# Altium PCB PC110.PcbDoc (part 20 of 24)
Units mm, origin at the board's own origin, x right, y up, seen from the top; angles counter-clockwise.
Board outline 150.05 x 107.35 mm, 10 copper layers (In2.Cu, F.Cu, B.Cu, In1.Cu, In3.Cu, In4.Cu, In5.Cu, In6.Cu, In7.Cu, In8.Cu); 936 components, 1434 nets, 4891 pads, 6088 vias.
Unrouted connection lines stored in the file: 2995.
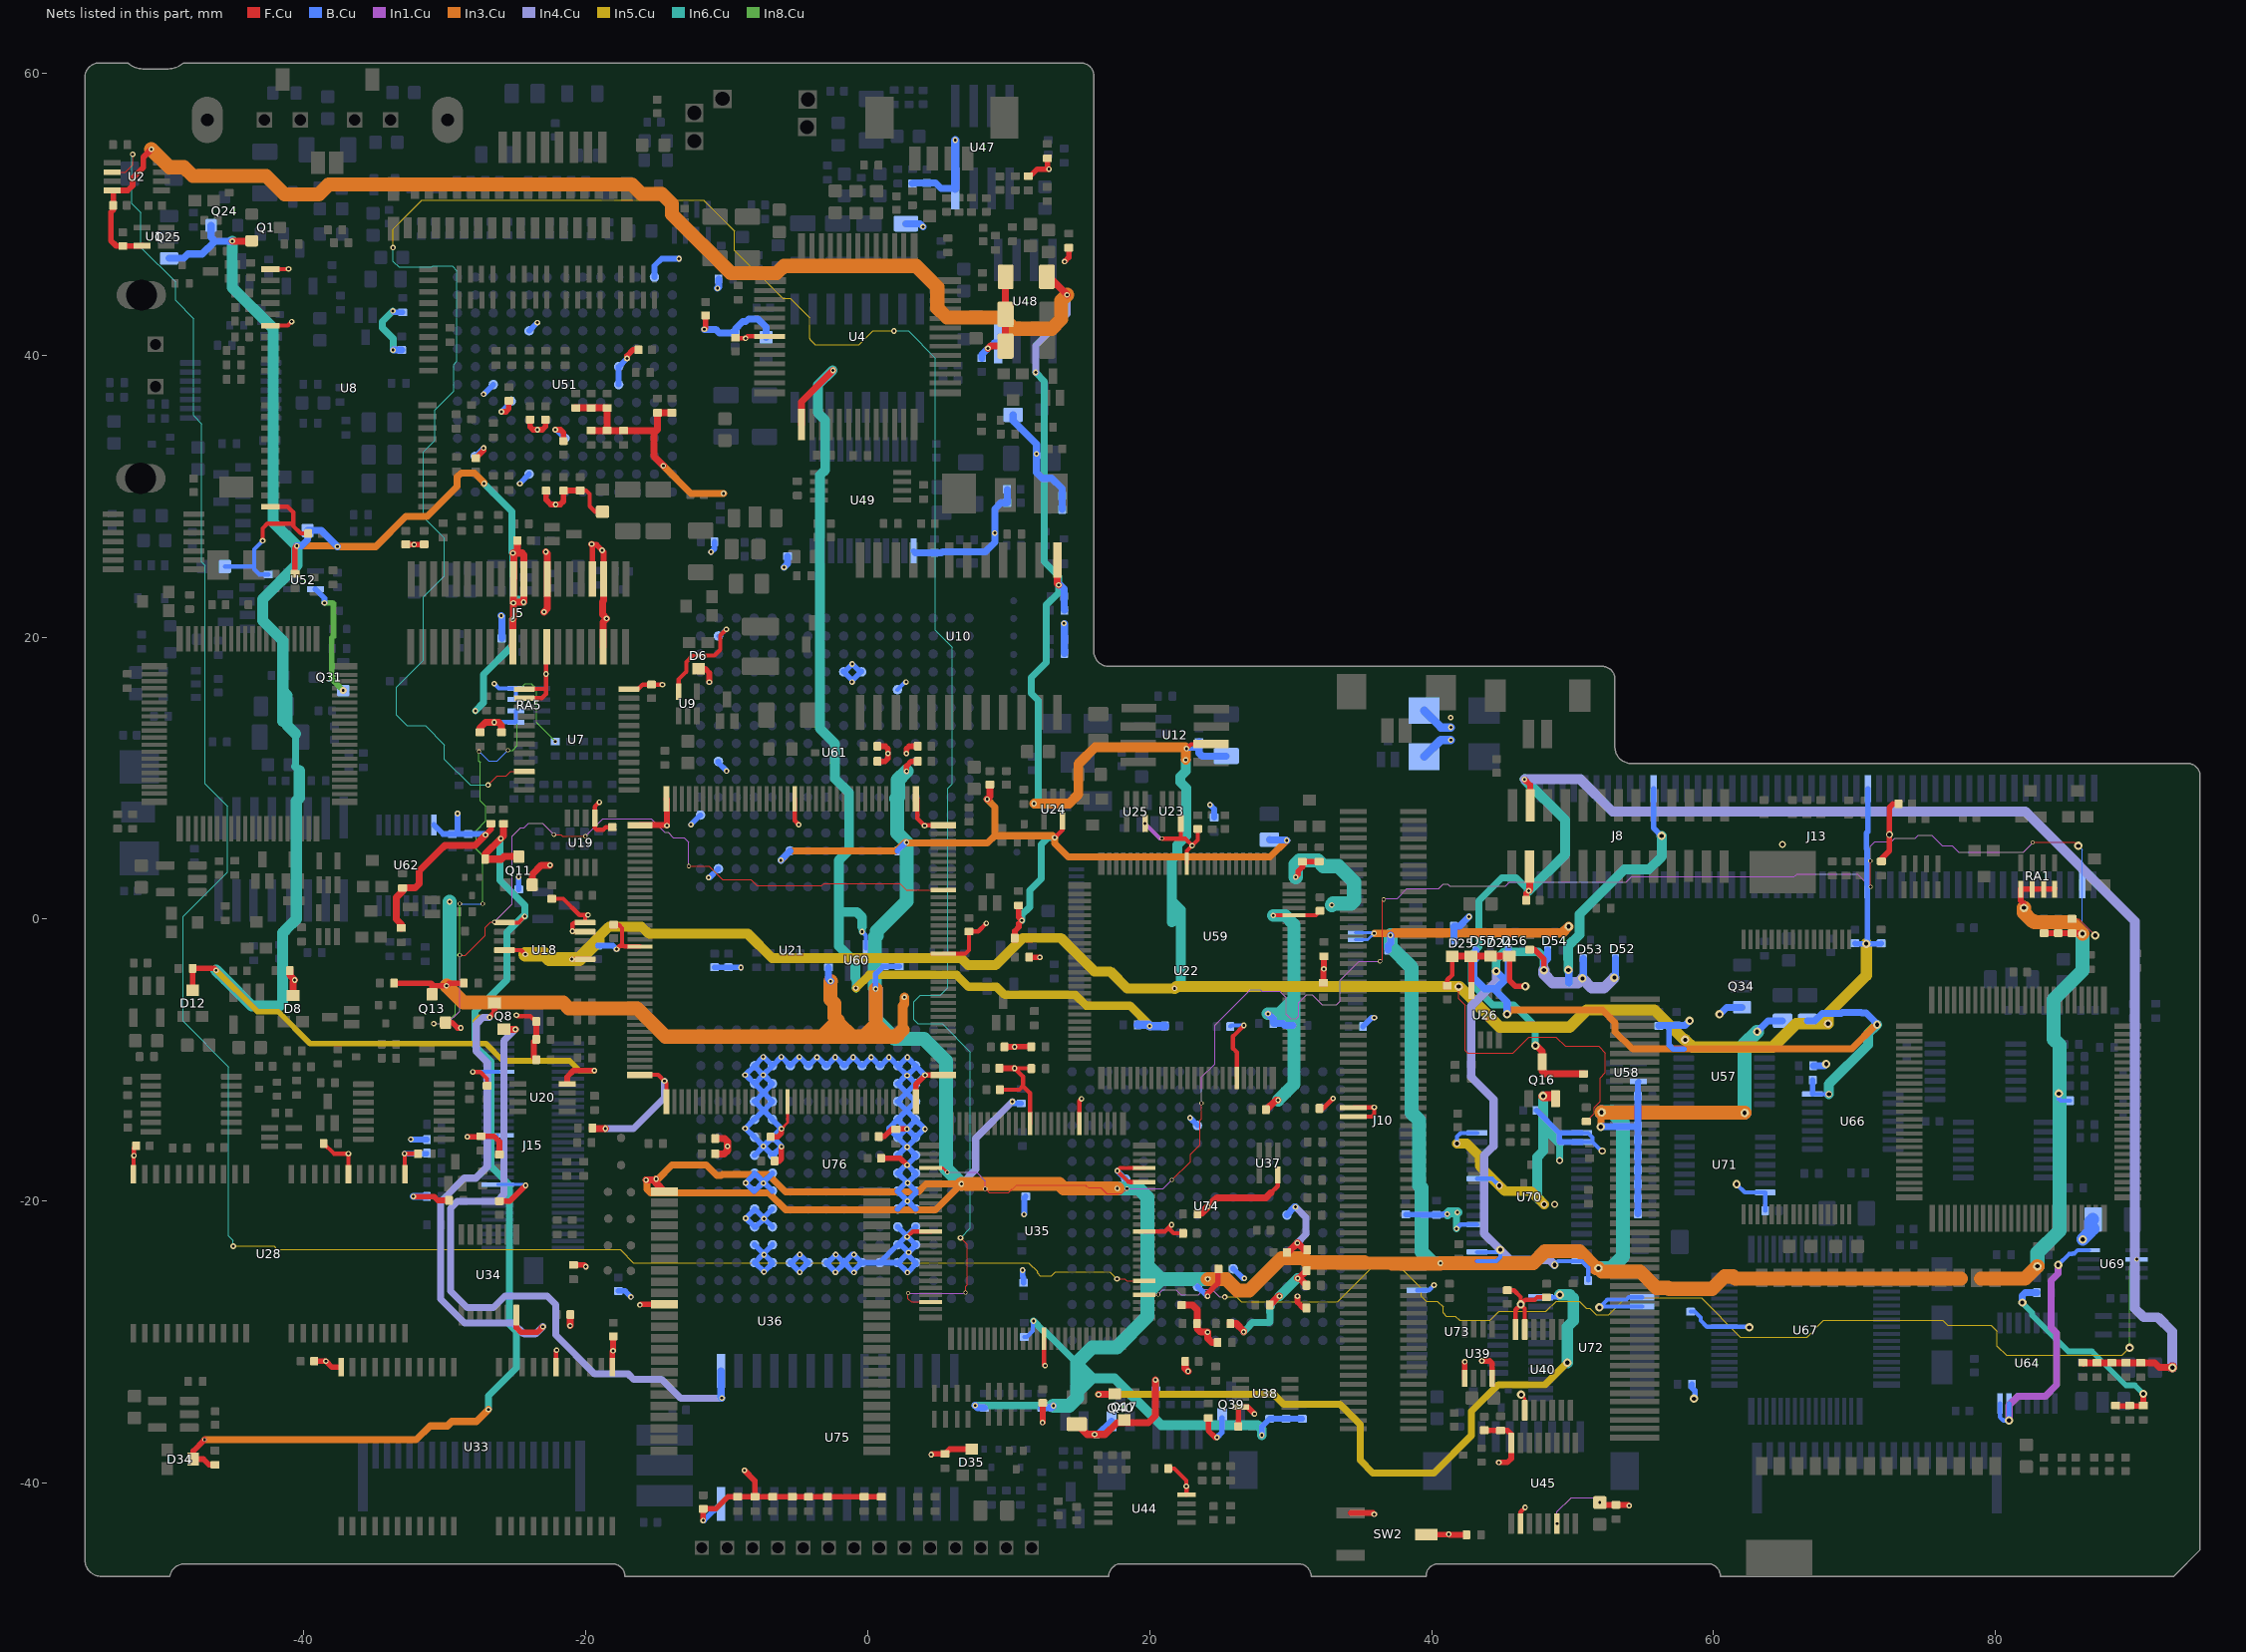
[diagram p27: the nets of this part, all layers, seen from the top]

## Via types
v1: diameter 0.3, hole 0.2, B.Cu to In8.Cu, tented both sides, 1934 vias
v2: diameter 0.4, hole 0.2, F.Cu to B.Cu, tented both sides, 1902 vias
v3: diameter 0.3, hole 0.2, F.Cu to In1.Cu, tented both sides, 1729 vias
v4: diameter 0.6, hole 0.3, F.Cu to B.Cu, tented both sides, 354 vias
v5: diameter 0.5, hole 0.3, F.Cu to B.Cu, tented both sides, 136 vias
v6: diameter 0.4, hole 0.2, B.Cu to In8.Cu, tented both sides, 12 vias
v7: diameter 0.3, hole 0.2, F.Cu to B.Cu, tented both sides, 6 vias
v8: diameter 0.6, hole 0.2, F.Cu to B.Cu, tented both sides, 4 vias
v9: diameter 0.5, hole 0.2, B.Cu to In8.Cu, tented both sides, 3 vias
v10: diameter 0.5, hole 0.2, F.Cu to B.Cu, tented both sides, 2 vias
v11: diameter 0.4, hole 0.3, F.Cu to B.Cu, tented both sides, 2 vias
v12: diameter 0.3, hole 0.2, F.Cu to In4.Cu, tented both sides, 2 vias
v13: diameter 0.6, hole 0.3, B.Cu to In8.Cu, tented both sides, 1 vias
v14: diameter 0.3, hole 0.2, F.Cu to In3.Cu, tented both sides, 1 vias

## Nets (pads, with @x,y where several pads share a name; then routed paths per layer and width w, separated by ;. In a path a pad name is that pad's centre, name@x,y a point inside that pad or via, vN(x,y) a via of type N, cw(c..) or ccw(c..) an arc to the next point about the centre after c; other vN are vias at no path point) (continued)
Pluto_Dock_IO2: J13.99 R130.2 U35.29 | length 117.5
  F.Cu w0.08: v3(8.33,-19.13) 8.61,-19.41 9.98,-19.41 10.54,-18.85 15.45,-18.85 15.65,-19.05 16.54,-19.05 16.97,-19.48 18.02,-19.48 v3(18.39,-19.11) ; v3(21.58,-18.49) 22.88,-17.19 22.88,-16.68 23.56,-16 23.56,-14.27 23.68,-14.15 v3(23.68,-13.04) ; v3(36.34,-2.99) 36.5,-2.83 36.5,1.31 v3(36.59,1.4) ; v3(71.12,4.13) 71.12,2.31 v3(71.14,2.29) ; v3(82.64,5.44) 82.66,5.46 85.6,5.46 v4(85.86,5.2) ; R130.2@85.42,0.03 85.89,0.03 v4(87.07,-1.15)
  F.Cu w0.2: U35.29@4.46,-17.65 5.35,-17.65 v3(5.64,-17.94)
  In1.Cu w0.08: v3(5.64,-17.94) 5.66,-17.96 7.72,-17.96 8.33,-18.57 v3(8.33,-19.13) ; v3(18.39,-19.11) 20.96,-19.11 v3(21.58,-18.49) ; v3(23.68,-13.04) 23.68,-11.2 24.62,-10.26 24.62,-7.51 27.14,-4.99 27.85,-4.99 27.97,-5.11 29.22,-5.11 29.67,-5.56 29.67,-6.72 30.01,-7.06 30.39,-7.06 30.58,-6.87 30.58,-5.92 31.13,-5.37 31.54,-5.37 32.24,-6.07 33.26,-6.07 33.5,-5.83 33.5,-4.32 34.83,-2.99 v3(36.34,-2.99) ; v3(36.59,1.4) 36.66,1.47 37.56,1.47 38.25,2.16 40.49,2.16 40.82,2.49 41.15,2.49 41.29,2.35 45.25,2.35 45.54,2.64 53.8,2.64 54.19,3.03 65.73,3.03 65.91,3.21 70.22,3.21 v3(71.14,2.29) ; v3(71.12,4.13) 71.12,5.18 71.45,5.51 72.61,5.51 72.85,5.75 74.3,5.75 74.51,5.96 75.46,5.96 76.21,5.21 76.92,5.21 77.37,4.76 81.96,4.76 v3(82.64,5.44)
  B.Cu w0.08: v4(85.86,5.2) 86.14,4.92 J13.99@86.14,2.45 86.14,-0.22 v4(87.07,-1.15)
Pluto_EN_IRDA: U7.10 U35.48 | length 178.4
  F.Cu w0.08: v2(-26.93,9.52) -26.27,10.18 -25.63,10.18 -25.335,10.475 U7.10@-24.362,10.475 ; v3(2.86,-26.52) 2.86,-26.93 3.08,-27.15 U35.48@4.46,-27.15 ; v2(6.58,-22.6) 7.05,-23.07 7.05,-25.92 6.94,-26.03 v3(6.94,-26.49)
  In1.Cu w0.08: v3(2.86,-26.52) 6.91,-26.52 v3(6.94,-26.49)
  In5.Cu w0.08: v2(-33.67,47.63) -33.67,48.96 -31.64,50.99 -11.63,50.99 -9.46,48.82 -9.46,47.44 -6.04,44.02 -5.48,44.02 -4.11,42.65 -4.11,41.22 -4.09,41.2 -4.09,41.11 -3.73,40.75 -0.61,40.75 0.36,41.72 v2(1.86,41.72)
  In6.Cu w0.08: v2(-33.67,47.63) -33.67,46.66 -33.26,46.25 -32.9,46.25 -32.895,46.245 -30.905,46.245 -30.83,46.32 -29.46,46.32 -29.13,45.99 -29.13,39.57 -29.37,39.33 -29.37,37.46 -30.71,36.12 -30.71,33.95 -31.51,33.15 -31.51,28.53 -30.02,27.04 -30.02,24.33 -31.51,22.84 -31.51,18.38 -33.44,16.45 -33.44,14.49 -32.67,13.72 -31.37,13.72 -30.02,12.37 -30.02,11.33 -28.21,9.52 v2(-26.93,9.52) ; v2(1.86,41.72) 2.88,41.72 4.81,39.79 4.81,20.49 6.01,19.29 6.01,9.61 5.68,9.28 5.68,-4.86 5.15,-5.39 3.74,-5.39 3.27,-5.86 3.27,-7.14 3.55,-7.42 5.28,-7.42 7.27,-9.41 7.27,-21.91 v2(6.58,-22.6)
Pluto_ESS_AEN: U35.79 U69.2 | length 85.3
  F.Cu w0.08: U35.79@19.61,-26.65 20.57,-26.65 v3(20.6,-26.62)
  In1.Cu w0.08: v3(20.6,-26.62) 20.93,-26.29 21.87,-26.29 22.22,-26.64 23.48,-26.64 23.87,-26.25 24.4,-26.25 24.94,-26.79 v2(25.33,-26.79)
  In5.Cu w0.08: v2(25.33,-26.79) 26.16,-26.79 26.5,-27.13 33.33,-27.13 35.69,-24.77 37.86,-24.77 39.26,-26.17 39.26,-26.74 39.63,-27.11 40.45,-27.11 40.45,-27.12 40.82,-27.49 40.82,-27.93 41.05,-28.16 41.68,-28.16 41.98,-28.46 44.15,-28.46 44.795,-27.815 48.115,-27.815 48.84,-27.09 50.49,-27.09 50.98,-27.58 51.21,-27.58 51.68,-28.05 52.57,-28.05 53.78,-26.84 59.12,-26.84 61.91,-29.63 66.64,-29.63 67.81,-28.46 76.24,-28.46 76.59,-28.81 79.67,-28.81 80.1,-29.24 80.1,-30.27 80.76,-30.93 88.97,-30.93 v4(89.5,-30.4)
  In8.Cu w0.08: v4(89.5,-30.4) 89.5,-24.63 90.005,-24.125 v1(90.01,-24.125)
Pluto_IRDA_OUT: U2.6 U35.81 | length 151.4
  F.Cu w0.08: U2.6@-53.59,52.99 -52.67,52.99 -52.14,53.52 v2(-52.14,54.25) ; v2(17.68,-25.51) 18.22,-25.51 18.36,-25.65 U35.81@19.61,-25.65
  In5.Cu w0.08: v2(-45.01,-23.19) -42.14,-23.19 -41.9,-23.43 -17.56,-23.43 -16.62,-24.37 11.42,-24.37 12.03,-24.98 12.03,-25.09 12.23,-25.29 13.02,-25.29 13.3,-25.01 17.18,-25.01 v2(17.68,-25.51)
  In6.Cu w0.08: v2(-52.14,54.25) -52.21,54.18 -52.21,50.76 -51.56,50.11 -51.55,50.11 -51.55,47.65 -49.1,45.2 -49.1,43.88 -47.82,42.6 -47.82,35.71 -47.24,35.13 -47.24,25.33 -46.99,25.08 -46.99,9.6 -45.41,8.02 -45.41,3.35 -48.56,0.2 -48.56,-7.24 -45.33,-10.47 -45.33,-22.48 -45.01,-22.8 v2(-45.01,-23.19)
Pluto_Switched_PNET5: C86.1 J8.12 J8.15 Q16.3 R129.2 R187.2 R189.2 R190.2 R191.2 R194.2 | length 125
  F.Cu w0.4: v2(46.59,9.92) 46.99,9.52 J8.12@46.99,8.08 ; C86.1@46.71,1.34 46.71,1.83 v2(46.89,2.01)
  F.Cu w0.5: v2(46.89,2.01) 46.95,2.07 46.95,3.72 J8.15@46.94,3.73 ; v4(47.36,-8.97) 47.44,-8.97 47.85,-9.38 47.85,-10.1 Q16.3@47.84,-10.11 47.84,-10.78 48.03,-10.97 R129.2@50.77,-10.97 ; R190.2@86.2,-31.475 87.2,-31.475 88.24,-31.475 89.25,-31.475 90.29,-31.475 91.285,-31.475 91.6,-31.79 v4@92.54,-31.79 ; R190.2@86.23,-31.49 R190.2@86.24,-31.48
  F.Cu w0.7: v4@92.54,-31.79 v4(92.55,-31.8)
  In4.Cu w0.7: v2(46.59,9.92) 50.55,9.92 52.83,7.64 82.12,7.64 89.89,-0.13 89.89,-27.61 90.51,-28.23 91.52,-28.23 92.52,-29.23 92.52,-31.77 v4(92.55,-31.8)
  In6.Cu w0.5: v2(46.89,2.01) 46.89,2.05 46,2.94 44.98,2.94 43.34,1.3 43.34,-1.98 42.81,-2.51 42.81,-4.56 44.32,-6.07 45.83,-6.07 47.36,-7.6 v4(47.36,-8.97)
  In6.Cu w0.7: v2(46.59,9.92) 49.46,7.05 49.46,4.58 v2(46.89,2.01)
PNET1: C5.1 C17.1 C26.1 C31.2 C32.1 C34.1 C37.1 C38.1 C39.1 C40.1 C41.1 C42.2 C43.1 C64.2 C65.2 C69.1 C71.2 C72.1 C73.2 C74.2 C75.1 C77.2 C78.2 C83.1 C95.1 C101.2 C102.2 C103.1 C104.2 C105.1 C106.2 C107.2 C108.2 C109.2 C110.2 C111.1 C112.2 C113.2 C114.2 C115.2 C117.2 C121.1 C122.1 C123.1 C127.2 C128.1 C140.2 C156.2 C172.2 C208.2 C211.2 C212.1 C215.1 C219.1 C242.2 C247.1 C252.1 C253.1 C254.2 C255.2 C256.2 C274.1 C275.1 C280.2 D8.2 D44.1 D52.2 D53.2 D54.2 D56.2 D57.2 J5.8 J5.33 J15.5 J15.14 J15.21 L3.1 L6.2 Q13.2 Q31.2 R45.2 R59.2 R84.2 R94.1 R96.1 R102.1 R105.1 R109.1 R110.2 R117.1 R118.2 R120.1 R127.2 R148.2 R152.1 R156.1 R157.2 R158.2 R161.2 R162.2 R165.2 R173.1 R177.1 R182.1 R215.2 R216.1 R228.1 R229.2 R246.1 R249.1 R258.1 R287.2 R292.1 R310.2 R312.1 R349.2 R372.1 R393.1 R400.2 R401.2 R403.2 RA5.5 RA5.6 RA5.7 RA5.8 SW2.1 U7.1 U7.2 U8.1 U8.6 U8.20 U9.5 U19.1 U21.1 U21.18 U21.36 U21.37 U21.54 U21.72 U21.73 U21.90 U21.108 U21.109 U21.126 U21.144 U22.13 U22.70 U23.5 U25.5 U28.1 U28.6 U28.22 U33.1 U33.6 U33.22 U35.7 U35.14 U35.38 U35.64 U35.88 U35.95 U35.97 U37.5 U38.8 U39.5 U39.8 U40.2 U40.13 U40.14 U45.2 U45.6 U45.16 U49.1 U51.B11 U51.C7 U51.D8 U51.E4 U51.E12 U51.G10 U51.K6 U51.K7 U51.M1 U52.5 U61.A12 U61.B2 U61.B9 U61.B15 U61.J4 U61.K4 U61.M5 U62.14 U64.13 U64.14 U66.14 U67.57 U69.8 U70.15 U70.16 U70.17 U72.1 U72.2 U73.20 U74.D8 U74.K4 U74.N8 U76.D3 U76.D4 U76.D5 U76.D6 U76.D7 U76.D8 U76.D9 U76.D10 U76.D11 U76.D12 U76.D13 U76.D14 U76.E3 U76.E4 U76.E5 U76.E6 U76.E7 U76.E8 U76.E9 U76.E10 U76.E11 U76.E12 U76.E13 U76.E14 U76.F3 U76.F14 U76.G3 U76.G14 U76.H3 U76.H14 U76.J3 U76.J14 U76.K3 U76.K14 U76.L3 U76.L14 U76.M3 U76.M4 U76.M5 U76.M6 U76.M7 U76.M8 U76.M9 U76.M10 U76.M11 U76.M12 U76.M13 U76.M14 U76.N3 U76.N4 U76.N5 U76.N6 U76.N7 U76.N8 U76.N9 U76.N10 U76.N11 U76.N12 U76.N13 U76.N14 | length 571.8
  F.Cu w0.08: C38.1@-32.77,26.59 C38.1@-32.75,26.57 ; C41.1@-31.49,26.57 C41.1@-31.47,26.59 ; v2(-21.11,-28.83) v2@-21.09,-28.81 ; C74.2@9.7,-9.06 C74.2@9.71,-9.05 ; v2(10.42,-9.05) v2@10.43,-9.04 ; R118.2@11.45,-2.69 R118.2@11.46,-2.7 ; v2@41.19,-43.64 v2(41.21,-43.62) v2@41.26,-43.67 ; v2@42.34,-31.4 v2(42.35,-31.39) ; v3(51.93,-41.375) C140.2@52.095,-41.54
  F.Cu w0.2: R157.2@-27.48,-15.44 R157.2@-27.43,-15.39 ; v2(-6.12,-14.87) -5.68,-14.43 U21.54@-5.68,-12.94 ; v4(46.35,-33.73) 46.6,-33.98 U40.2@46.6,-34.825
  F.Cu w0.3: U28.22@-52.085,-18.095 -52.085,-16.805 v2(-52.05,-16.77) -52.05,-16.23 C95.1@-51.89,-16.07 ; v2(-42.92,26.84) -42.92,27.72 -42.58,28.06 -40.75,28.06 ; U8.20@-42.37,29.25 -41.13,29.25 -40.75,28.87 -40.75,28.06 ; U8.6@-42.37,42.1 -41.14,42.1 v2(-40.86,42.38) ; U8.1@-42.37,46.1 -41.1,46.1 v2(-41.08,46.12) ; C26.1@-39.69,27.36 -40.21,27.36 -40.75,27.9 -40.75,28.06 ; R156.1@-38.6,-15.9 -37.87,-16.63 v2(-36.84,-16.63) -36.835,-16.635 U28.6@-36.835,-18.095 ; U28.1@-32.835,-18.095 -32.835,-16.655 v2(-32.86,-16.63) C105.1@-31.9,-16.63 ; v2(-28.02,-10.83) -27.49,-10.83 -27,-11.32 C65.2@-27,-11.81 ; v2(-24.92,-6.81) -24.85,-6.88 -23.94,-6.88 R94.1@-23.56,-7.26 ; U7.2@-24.362,15.675 -23.115,15.675 -22.82,15.97 -22.82,16.33 ; U7.1@-24.362,16.325 -22.825,16.325 -22.82,16.33 ; J5.33@-22.78,19.33 -22.82,19.29 v2(-22.82,17.39) -22.82,16.33 ; U33.6@-22.105,-31.775 -22.105,-30.605 v2(-22.07,-30.57) ; C32.1@-20.4,30.4 -19.98,30.4 -19.73,30.15 -19.73,29.29 -19.342,28.902 L3.1@-18.81,28.902 ; v2(-19.04,8.3) -19.36,7.98 U19.1@-19.36,7.19 -19.36,6.49 -19.22,6.35 -18.76,6.35 -18.58,6.53 C69.1@-18.11,6.53 ; C64.2@-18.02,-0.39 -17.66,-0.39 -17.42,-0.63 -17.42,-1.893 ; v2(-17.82,-2.13) -17.583,-1.893 -17.42,-1.893 ; U21.36@-16.18,-11.04 -14.86,-11.04 v2(-14.42,-11.48) -14.28,-11.62 U21.37@-14.28,-12.94 ; U21.18@-16.153,-1.943 -16.166,-1.93 -17.26,-1.93 -17.297,-1.893 -17.42,-1.893 ; U9.5@-13.42,16.14 -13.42,17.01 -12.87,17.56 -12.87,18.25 -12.42,18.7 -10.87,18.7 -10.46,19.11 -10.46,20.13 v2(-10.03,20.56) ; U21.126@-5.18,8.535 -5.18,6.99 v2(-4.89,6.7) ; v2(2.8,-22.53) 3.18,-22.15 U35.38@4.46,-22.15 ; U21.109@3.52,8.56 3.52,7.14 v2(4.03,6.63) 4.06,6.66 U21.108@5.37,6.66 ; U21.90@5.37,-2.44 6.93,-2.44 7.18,-2.19 C72.1@7.18,-0.87 7.83,-0.87 v2(8.41,-0.29) ; C78.2@9.37,-12.09 10.75,-12.09 11.01,-11.83 ; U35.14@11.51,-14.5 11.51,-12.33 11.01,-11.83 ; R120.1@11.6,-10.59 11.58,-10.57 v2(10.42,-10.57) 11.01,-11.16 11.01,-11.83 ; U35.64@12.51,-29.75 12.51,-31.59 v2(12.58,-31.66) ; U35.7@15.01,-14.5 15.01,-12.89 v2(15.16,-12.74) ; U35.88@19.61,-22.15 21.07,-22.15 21.315,-21.905 ; U35.95@19.61,-18.65 18.637,-18.65 18.597,-18.61 18.46,-18.61 v2(17.7,-17.85) 17.9,-17.65 U35.97@19.61,-17.65 ; v3(20.87,5.72) 20.88,5.71 22.34,5.71 ; v2(21.55,-21.67) 21.315,-21.905 ; U23.5@22.21,6.8 22.21,5.84 22.34,5.71 ; C117.2@22.37,-22.28 21.69,-22.28 21.315,-21.905 ; U22.13@22.63,3.94 22.63,4.84 v2(23.01,5.22) ; C83.1@23.41,6.41 23.41,5.62 v2(23.01,5.22) ; U22.70@26.18,-11.26 26.18,-9.44 25.91,-9.17 25.91,-8.3 v2(26.68,-7.53) ; 28.59,-19.42 29.08,-18.93 U37.5@29.08,-18.15 ; C127.2@45.37,-26.32 45.84,-26.32 46.32,-26.8 v4(46.32,-27.33) ; U40.14@45.95,-29.1 45.95,-27.7 v4(46.32,-27.33) ; U45.2@46.295,-42.873 46.295,-42.055 v2(46.63,-41.72) ; U40.13@46.6,-29.1 46.6,-27.61 v4(46.32,-27.33) ; C128.1@48.15,-26.82 47.49,-26.82 47.32,-26.99 46.66,-26.99 v4(46.32,-27.33) ; 22.34,5.71 22.52,5.71 v2(23.01,5.22)
  F.Cu w0.4: C101.2@-39.27,-31.35 -38.45,-31.35 v2(-38.44,-31.34) -38.005,-31.775 U33.22@-37.355,-31.775 ; C38.1@-32.75,26.57 v2(-32.18,26.57) C41.1@-31.49,26.57 ; v2(-32.23,-19.67) -30.77,-19.67 -30.5,-19.94 R152.1@-29.7,-19.94 ; Q13.2@-29.95,-7.33 -29.48,-7.33 -29.1,-7.71 v2(-28.86,-7.71) ; v2(-28.4,-15.44) R157.2@-27.48,-15.44 ; C31.2@-27.8,32.7 -27.25,33.25 v2(-27.25,33.42) ; R157.2@-27.43,-15.39 -26.51,-15.39 -26.13,-15.77 C102.2@-26.13,-16.69 ; v2(-27.12,5.98) -26.72,6.38 -26.72,6.74 R96.1@-26.74,6.76 ; C104.2@-26.12,-20 -25.39,-20 v2(-24.27,-18.88) ; v2(-25.98,35.99) -25.67,35.99 -25.46,36.2 C43.1@-25.46,36.78 ; C34.1@-23.95,35.43 -23.95,34.92 -23.75,34.72 v2(-23.43,34.72) -23.08,34.72 -22.86,34.94 C40.1@-22.86,35.43 ; R94.1@-23.56,-7.26 R94.1@-23.51,-7.26 R102.1@-23.51,-8.51 -23.68,-8.68 -23.68,-9.79 R105.1@-23.51,-9.96 ; C37.1@-22.82,30.4 -22.82,29.76 -22.48,29.42 v2(-22.14,29.42) -21.8,29.42 -21.58,29.64 C39.1@-21.58,30.4 C32.1@-20.4,30.4 ; v2(-22.16,34.72) -21.79,34.72 -21.58,34.51 C42.2@-21.58,33.92 ; R148.2@-20.87,-24.51 -20.13,-24.51 v2(-20,-24.64) ; U33.1@-18.105,-31.775 -18.105,-30.655 v2(-18.06,-30.61) -18.06,-29.59 C103.1@-18.05,-29.58 ; v2(-17.07,39.77) -17.07,39.96 -16.64,40.39 C5.1@-16.26,40.39 ; U21.1@-16.153,6.66 -16.133,6.68 -14.29,6.68 v2(-14.25,6.64) -14.25,8.505 U21.144@-14.28,8.535 ; v2(-11.59,41.84) -11.5,41.93 C17.1@-11.5,42.82 ; C110.2@-6.89,-15.44 -6.39,-15.44 -6.12,-15.17 v2(-6.12,-14.87) ; C113.2@-6.61,-17.15 -6.27,-17.15 -6.12,-17 v2(-6.12,-16.13) ; C77.2@0.69,11.2 1.23,11.2 1.43,11.4 v2(1.43,11.76) 1.43,12.09 1.25,12.27 C73.2@0.69,12.27 ; C112.2@0.78,-15.41 1.18,-15.41 1.69,-14.9 R161.2@2,-14.9 2.02,-14.88 v2(2.78,-14.88) ; C107.2@0.95,-16.96 2.32,-16.96 v2(2.8,-17.44) ; v2(2.74,11.76) 2.74,12.07 2.94,12.27 C75.1@3.55,12.27 ; U21.72@3.42,-12.94 3.42,-11.71 v2(4.07,-11.06) 5.35,-11.06 U21.73@5.37,-11.04 ; C71.2@9.33,-10.57 v2(10.42,-10.57) ; C74.2@9.71,-9.05 v2(10.42,-9.05) ; v2@10.43,-9.04 R117.1@11.6,-9.04 ; R118.2@11.46,-2.7 v2(12.21,-2.7) ; v2(12.4,-35.7) 12.41,-35.69 C111.1@12.41,-34.31 ; v2(24.11,-26.74) 24.11,-26.55 24.4,-26.26 24.4,-26.242 24.85,-25.792 24.85,-24.84 C114.2@24.88,-24.81 ; C121.1@26.28,-35.97 26.28,-34.76 U38.8@26.44,-34.6 26.94,-34.6 v2(27.43,-35.09) ; v2(30.48,-26.74) 30.48,-27.16 30.89,-27.57 R177.1@31.12,-27.57 ; 34.25,-42.115 35.835,-42.115 v2(35.93,-42.21) ; SW2.1@39.625,-43.64 v2@41.19,-43.64 ; v2@41.26,-43.67 R216.1@42.48,-43.67 ; U39.5@42.34,-32.55 v2@42.34,-31.4 ; v2(43.56,-31.33) 44.11,-31.33 44.29,-31.51 U39.8@44.29,-32.55 ; C123.1@43.73,-36.24 43.76,-36.27 R182.1@44.89,-36.27 45.38,-36.27 45.645,-36.535 U45.16@45.645,-37.148 45.645,-38.255 45.37,-38.53 v2(44.77,-38.53) ; R127.2@46.95,-2.16 46.97,-2.14 47.27,-2.14 47.96,-2.83 v4(47.96,-3.61) ; C140.2@52.095,-41.54 R215.2@53.08,-41.54 53.95,-41.54 v2(54.01,-41.6)
  F.Cu w0.5: R84.2@-40.99,-3.65 -40.98,-3.66 -40.98,-3.99 v2(-40.65,-4.32) -40.77,-4.44 D8.2@-40.77,-5.415 ; R110.2@-33.09,-0.62 -33.09,-0.36 -33.44,-0.01 -33.44,1.54 -33,1.98 R109.1@-33,2.22 -32.09,2.22 -31.81,2.5 -31.81,2.79 -31.82,2.8 -31.82,3.43 -30.45,4.8 -30.44,4.8 -30,5.24 -27.86,5.24 v2(-27.12,5.98) ; R45.2@-27.51,13.26 -27.51,13.57 -27.12,13.96 v2(-26.49,13.96) -26.18,13.96 -25.98,13.76 R59.2@-25.98,13.26 ; v2(-22.96,21.79) -22.73,22.02 J5.8@-22.73,24.13 -22.73,25.96 v2(-22.83,26.06) ; v2@-21.09,-28.81 C106.2@-21.09,-28.04 ; R158.2@-19.54,-14.8 -19.49,-14.85 v2(-18.61,-14.85) ; C108.2@-10.82,-16.64 -10.17,-16.64 -9.95,-16.42 v2(-9.95,-16.11) -9.95,-15.77 -10.16,-15.56 C109.2@-10.82,-15.56 ; C122.1@22.26,-27.38 23.05,-27.38 23.36,-27.69 R165.2@23.36,-28.69 23.36,-29.02 23.63,-29.29 v2(24.11,-29.29) 24.11,-29.72 24.41,-30.02 R173.1@24.81,-30.02 ; C115.2@22.51,-31.36 22.51,-31.85 v2(22.72,-32.06) ; R162.2@23.39,-20.91 23.6,-20.91 24.595,-19.915 ; v2(24.13,-20.38) 24.595,-19.915 ; 28.59,-19.42 28.58,-19.42 28.24,-19.76 24.97,-19.76 24.75,-19.76 24.595,-19.915
  In1.Cu w0.08: v3(48.895,-42.872) 48.895,-42.025 49.9,-41.02 51.575,-41.02 v3(51.93,-41.375)
  In1.Cu w0.3: v3(19.67,6.78) 20.73,5.72 v3(20.87,5.72)
  In1.Cu w0.5: v4(80.95,-35.56) 80.95,-34.46 81.56,-33.85 83.51,-33.85 84.34,-33.02 84.34,-29.35 83.95,-28.96 83.95,-25.64 84.44,-25.15 v4(84.44,-24.52)
  In3.Cu w0.5: v4(45.35,-6.74) 45.65,-6.44 52.11,-6.44 53.01,-7.34 53.01,-7.98 54.23,-9.2 69.79,-9.2 71.51,-7.48 v4(71.6,-7.48)
  In4.Cu w0.5: v2(-18.61,-14.85) -16.61,-14.85 -14.42,-12.66 v2(-14.42,-11.48)
  In4.Cu w0.6: v4(44.58,-3.68) 44.58,-4.38 42.79,-6.17 42.79,-11.18 44.38,-12.77 44.38,-16.1 43.71,-16.77 43.71,-22.29 v4(44.87,-23.45) 45.59,-24.17 48.37,-24.17 v5(48.72,-24.52)
  In4.Cu w0.8: v4(47.96,-3.61) 47.96,-3.891 48.589,-4.52 50.38,-4.52 v4(50.7,-4.2) 50.7,-4.22 51.35,-4.87 52.23,-4.87 52.93,-4.17 52.93,-4.14
  In6.Cu w0.5: v2(-33.68,43.14) -34.43,42.39 -34.43,41.95 -33.67,41.19 v2(-33.67,40.37)
  In6.Cu w0.6: v4(44.58,-3.68) 44.58,-2.86 45.12,-2.32 47.56,-2.32 47.96,-2.72 v4(47.96,-3.61)
  In6.Cu w0.7: v5(68.18,-12.42) 68.18,-11.69 70.97,-8.9 70.97,-8.11 v4(71.6,-7.48)
  In8.Cu w0.4: v2(-38.54,22.43) -37.98,22.43 -37.9,22.35 -37.9,20.07 -38.01,19.96 -38.01,17.02 v9(-37.21,16.22)
  B.Cu w0.08: v2(-32.41,-15.61) v2@-32.39,-15.63 ; v2(-27.25,37.24) v2@-27.24,37.24 ; v2(-26.49,13.96) v2@-26.475,13.975 ; v2(-24.68,30.89) v2@-24.68,30.91 ; v2(-22.16,34.72) v2@-22.09,34.72 ; v2(10.98,-24.89) v2@11.05,-24.96 ; U66.14@67.007,-12.4 U66.14@67.03,-12.377
  B.Cu w0.2: v2(-28.4,-15.44) -28.32,-15.36 -26.29,-15.36 J15.14@-26.25,-15.32 ; J15.21@-26.25,-18.82 -24.33,-18.82 v2(-24.27,-18.88)
  B.Cu w0.3: D44.1@-45.593,25.01 -43.63,25.01 -43.52,25.12 ; v2(-42.92,26.84) -43.52,26.24 -43.52,25.12 ; R287.2@-42.52,24.44 -43.14,24.44 -43.52,24.82 -43.52,25.12 ; R403.2@-31.3,-16.63 R403.2@-31.26,-16.59 ; v2(-28.02,-10.83) -28.01,-10.82 J15.5@-26.2,-10.82 ; v2(-26.49,16.7) -26.165,16.375 RA5.8@-24.96,16.375 RA5.7@-24.96,15.6 ; v2@-26.475,13.975 RA5.5@-24.96,13.975 RA5.6@-24.96,14.775 ; U61.B2@-10.595,20.085 -10.535,20.085 -10.06,20.56 v2(-10.03,20.56) ; U61.M5@2.1,16.27 2.65,16.82 v2(2.72,16.82) ; C208.2@9.88,30.5 C208.2@9.89,30.49 ; C247.1@25.72,-7.61 25.8,-7.53 v2(26.68,-7.53) ; U73.20@38.967,-26.325 39.795,-26.325 v2(40.17,-25.95) ; U70.16@43.22,-24.26 44.59,-24.26 44.87,-23.98 v4(44.87,-23.45) 44.71,-23.61 U70.17@43.22,-23.61 ; v5(48.72,-24.52) 48.98,-24.26 U70.15@50.645,-24.26 51.105,-24.72 C275.1@51.105,-25.63 ; U72.2@54.93,-27.475 51.965,-27.475 v4(51.9,-27.54) 52.46,-26.98 53.817,-26.98 53.972,-26.825 U72.1@54.93,-26.825 ; C274.1@58.37,-27.835 58.665,-27.835 59.08,-28.25 59.08,-28.46 59.53,-28.91 62.49,-28.91 v4(62.53,-28.95) ; U66.14@67.007,-12.4 67.028,-12.42 v5(68.18,-12.42) ; U64.14@80.31,-34.353 80.31,-35.31 80.56,-35.56 v4(80.95,-35.56) 80.95,-34.362 U64.13@80.96,-34.353 ; v4(84.44,-24.52) 85.21,-23.75 85.43,-23.75 85.48,-23.7 85.6,-23.7 85.825,-23.475 U69.8@86.61,-23.475
  B.Cu w0.4: U52.5@-39.18,23.4 -38.54,22.76 v2(-38.54,22.43) ; v2(-33.68,43.14) -33.58,43.04 R229.2@-32.99,43.04 ; v2(-32.86,-16.63) R403.2@-31.3,-16.63 ; v2@-32.39,-15.63 R400.2@-31.26,-15.63 ; U62.14@-30.77,6.683 -30.127,6.04 C254.2@-29.47,6.04 -29.1,6.04 ; v2(-29.09,7.49) -29.1,7.48 -29.1,6.04 ; U51.B11@-27.83,32.84 v2(-27.25,33.42) ; v2@-27.24,37.24 U51.C7@-26.56,37.92 ; v2(-27.12,5.98) -27.18,6.04 C256.2@-28.33,6.04 -29.1,6.04 ; v2(-25.98,35.99) -25.98,36 -25.29,36.69 U51.D8@-25.29,36.745 ; R349.2@-24.76,2.12 v2(-24.76,3) ; v2@-24.68,30.91 U51.E12@-24.02,31.57 ; U51.E4@-24.02,41.73 v2(-23.44,42.31) ; v2@-22.09,34.72 U51.G10@-21.48,34.11 ; C255.2@-19.15,-1.88 -18.07,-1.88 v2(-17.82,-2.13) ; U51.K7@-17.67,37.92 U51.K6@-17.67,39.19 -17.65,39.19 v2(-17.07,39.77) ; U51.M1@-15.13,45.54 -15.13,46.34 -14.62,46.85 v2(-13.39,46.85) ; v2(-12.54,6.71) U61.A12@-11.87,7.38 ; v2(-11.29,2.95) -11.22,2.95 U61.B15@-10.6,3.57 ; v2(-11.11,26.05) -10.87,26.29 C212.1@-10.87,26.76 ; C253.1@-10.86,-3.41 C252.1@-9.88,-3.41 -9.02,-3.41 v2(-9,-3.43) ; U61.B9@-10.6,11.19 -10.6,11.11 -10.02,10.53 v2(-10.02,10.51) ; U76.D13@-8.03,-23.09 -7.36,-23.76 v2(-7.36,-23.8) ; U76.D8@-8.03,-16.74 v2(-7.4,-16.11) ; U76.E13@-6.76,-23.09 -7.36,-23.69 v2(-7.36,-23.8) ; U76.E12@-6.76,-21.82 -7.34,-21.24 v2(-7.36,-21.24) ; U76.E11@-6.76,-20.55 -7.36,-21.15 v2(-7.36,-21.24) ; U76.E10@-6.76,-19.28 -7.32,-18.72 v2(-7.4,-18.72) ; U76.E9@-6.76,-18.01 -7.4,-18.65 v2(-7.4,-18.72) ; v2@-4.85,-9.83 -4.93,-9.83 U76.F3@-5.49,-10.39 -6.11,-9.77 v2(-6.13,-9.77) -6.75,-10.39 U76.E3@-6.76,-10.39 ; v2(-4.85,-9.77) -4.84,-9.77 U76.G3@-4.22,-10.39 -4.2,-10.39 v2(-3.6,-9.79) -3.55,-9.79 U76.H3@-2.95,-10.39 -2.9,-10.39 v2(-2.31,-9.8) -2.27,-9.8 U76.J3@-1.68,-10.39 -1.63,-10.39 v2(-1.04,-9.8) -1,-9.8 U76.K3@-0.41,-10.39 -0.35,-10.39 v2(0.24,-9.8) 0.27,-9.8 U76.L3@0.86,-10.39 0.92,-10.39 v2(1.51,-9.8) 1.54,-9.8 U76.M3@2.13,-10.39 ; U76.M12@2.13,-21.82 2.8,-22.49 v2(2.8,-22.53) ; U76.M11@2.13,-20.55 2.68,-20 v2(2.82,-20) ; U76.M7@2.14,-15.15 2.13,-15.16 U76.M7@2.13,-15.47 ; v2@2.81,-9.83 2.76,-9.83 2.2,-10.39 U76.M3@2.13,-10.39 ; v2(2.81,-9.79) 2.81,-9.8 U76.N3@3.4,-10.39 ; U49.1@3.255,26.12 U49.1@3.375,26 ; U76.N12@3.4,-21.82 2.8,-22.42 v2(2.8,-22.53) ; U76.N11@3.4,-20.55 2.85,-20 v2(2.82,-20) ; v2(10.98,-24.89) 10.98,-25.35 11.05,-25.42 C280.2@11.05,-25.79 ; v2(11.09,-20.94) 11.11,-20.92 11.11,-19.75 R393.1@11.2,-19.66 ; v2(17.7,-17.85) 18.27,-18.42 U74.K4@18.3,-18.42 ; v2(22.86,-14.09) U74.N8@23.38,-14.61 ; U74.D8@23.38,-26.04 24.08,-26.74 v2(24.11,-26.74) ; v2(24.28,8.11) 24.58,7.81 R310.2@24.58,7.21 ; R312.1@35.13,-7.61 35.76,-6.98 v2(35.93,-6.98) ; R372.1@58.46,-32.98 58.445,-32.995 58.445,-33.215 58.67,-33.44 58.67,-33.95 v4(58.61,-34.01) ; U66.14@67.03,-12.377 C242.2@67.03,-11.4 ; U76.D4@-8.03,-11.66 -7.42,-11.05 v2(-7.41,-11.05) ; U76.D4@-8.03,-11.66 -8.64,-11.05 v2(-8.69,-11.05) U76.D3@-8.03,-10.39 ; U76.D4@-8.03,-11.66 U76.E5@-6.76,-12.93 U76.D6@-8.03,-14.2 -8.05,-14.2 v2(-8.69,-14.84) -8.66,-14.84 U76.D7@-8.03,-15.47 -8.03,-15.48 v2(-7.4,-16.11) ; U76.D3@-8.03,-10.39 v2(-7.41,-9.77) -7.38,-9.77 U76.E3@-6.76,-10.39 ; U76.D3@-8.03,-10.39 -8.03,-10.43 v2(-7.41,-11.05) ; v2(-7.41,-11.05) -6.76,-10.4 U76.E3@-6.76,-10.39 ; v2(-7.41,-11.05) -7.37,-11.05 U76.E4@-6.76,-11.66 U76.D5@-8.03,-12.93 U76.E6@-6.76,-14.2 -6.76,-14.23 v2(-6.12,-14.87) -6.16,-14.87 U76.E7@-6.76,-15.47 ; v2(-7.4,-18.72) -7.47,-18.72 U76.D10@-8.03,-19.28 -8.08,-19.28 v2(-8.66,-18.7) -8.03,-18.07 U76.D9@-8.03,-18.01 -7.4,-18.64 v2(-7.4,-18.72) ; v2(-7.4,-16.11) U76.E7@-6.76,-15.47 ; v2(-7.4,-16.11) -7.39,-16.11 U76.E8@-6.76,-16.74 -6.73,-16.74 v2(-6.12,-16.13) -6.12,-16.11 U76.E7@-6.76,-15.47 ; v2(-7.36,-23.8) -7.32,-23.8 U76.E14@-6.76,-24.36 -6.76,-24.41 v2(-7.36,-25.01) -8.01,-24.36 U76.D14@-8.03,-24.36 -7.47,-23.8 v2(-7.36,-23.8) ; v2(-7.36,-21.24) -7.36,-21.22 U76.D11@-8.03,-20.55 -8.03,-20.58 v2(-8.66,-21.21) -8.64,-21.21 U76.D12@-8.03,-21.82 -7.94,-21.82 v2(-7.36,-21.24) ; U76.J14@-1.68,-24.36 -1.7,-24.36 v2(-2.27,-23.79) -2.84,-24.36 U76.H14@-2.95,-24.36 -2.29,-25.02 v2(-2.29,-25.04) -1.68,-24.43 U76.J14@-1.68,-24.36 ; U76.J14@-1.68,-24.36 -1.11,-23.79 v2(-0.98,-23.79) U76.K14@-0.41,-24.36 ; U76.J14@-1.68,-24.36 v2(-0.98,-25.06) -0.98,-24.93 U76.K14@-0.41,-24.36 ; U76.K14@-0.41,-24.36 U76.L14@0.86,-24.36 ; U76.L14@0.86,-24.36 U76.M14@2.13,-24.36 ; U76.L14@0.86,-24.36 U76.M13@2.13,-23.09 ; U76.M14@2.13,-24.36 2.18,-24.36 v2(2.9,-23.64) ; U76.M14@2.13,-24.36 2.82,-25.05 v2(2.82,-25.06) 3.4,-24.48 U76.N14@3.4,-24.36 2.9,-23.86 v2(2.9,-23.64) ; U76.M13@2.13,-23.09 2.35,-23.09 v2(2.9,-23.64) ; U76.M13@2.13,-23.09 2.69,-22.53 v2(2.8,-22.53) ; U76.M7@2.13,-15.47 2.72,-14.88 v2(2.78,-14.88) ; U76.M7@2.13,-15.47 2.13,-15.49 v2(2.8,-16.16) ; U76.M7@2.13,-15.47 1.53,-14.87 1.52,-14.87 1.52,-14.81 U76.M6@2.13,-14.2 ; U76.M6@2.13,-14.2 2.13,-14.23 v2(2.78,-14.88) ; U76.M6@2.13,-14.2 U76.N5@3.4,-12.93 U76.M4@2.13,-11.66 2.7,-11.09 v2(2.8,-11.09) ; U76.M3@2.13,-10.39 2.13,-10.42 v2(2.8,-11.09) ; v2(2.78,-14.88) 3.4,-14.26 U76.N6@3.4,-14.2 ; v2(2.78,-14.88) 2.81,-14.88 U76.N7@3.4,-15.47 ; v2(2.8,-22.53) 2.84,-22.53 U76.N13@3.4,-23.09 3.4,-23.14 v2(2.9,-23.64) ; v2(2.8,-17.44) 3.4,-16.84 U76.N8@3.4,-16.74 2.82,-16.16 v2(2.8,-16.16) ; v2(2.8,-17.44) 2.83,-17.44 U76.N9@3.4,-18.01 3.4,-18.14 v2(2.83,-18.71) ; v2(2.8,-17.44) 2.7,-17.44 U76.M9@2.13,-18.01 v2(2.83,-18.71) ; v2(2.8,-17.44) 2.13,-16.77 U76.M8@2.13,-16.74 2.71,-16.16 v2(2.8,-16.16) ; v2(2.8,-16.16) 3.4,-15.56 U76.N7@3.4,-15.47 ; v2(2.8,-11.09) 3.4,-10.49 U76.N3@3.4,-10.39 ; v2(2.8,-11.09) 2.83,-11.09 U76.N4@3.4,-11.66 ; v2(2.82,-20) 2.13,-19.31 U76.M10@2.13,-19.28 2.7,-18.71 v2(2.83,-18.71) ; v2(2.82,-20) 3.4,-19.42 U76.N10@3.4,-19.28 v2(2.83,-18.71) ; U76.N7@3.4,-15.47 3.98,-14.89 v2(4.06,-14.89) 3.4,-14.23 U76.N6@3.4,-14.2 ; U76.N6@3.4,-14.2 U76.M5@2.13,-12.93 U76.N4@3.4,-11.66 ; U76.N4@3.4,-11.66 4,-11.06 v2(4.07,-11.06) 4.052,-11.06 3.4,-10.408 U76.N3@3.4,-10.39 ; U76.F14@-5.49,-24.36 -5.39,-24.36 v2(-4.82,-23.79) -4.25,-24.36 U76.G14@-4.22,-24.36 -4.82,-24.96 v2(-4.82,-25.04) -4.82,-25.03 U76.F14@-5.49,-24.36 ; U61.J4@-1.725,17.57 -1.12,16.965 v2(-1.12,16.82) -1.12,16.905 -0.455,17.57 -0.57,17.57 v2(-1.1,18.1) -1.63,17.57 U61.J4@-1.725,17.57
  B.Cu w0.5: v2(-33.67,40.37) C172.2@-33.06,40.37 ; v2(-32.23,-19.67) R401.2@-31.26,-19.67 ; v2(-26,21.52) -25.96,21.48 C219.1@-25.96,19.91 ; v2(-11.59,41.84) -10.79,41.84 -10.52,41.57 C156.2@-9.41,41.57 -9.41,41.84 -8.87,42.38 -8.649,42.38 -8.459,42.57 -7.79,42.57 -7.21,41.99 L6.2@-7.21,41.277 ; v2(-10.66,44.75) -10.58,44.83 R228.1@-10.58,45.41 ; v2(-5.94,24.95) -5.69,25.2 R258.1@-5.69,25.75 ; U49.1@3.375,26 C215.1@4.74,26 5.23,26 5.24,25.99 5.32,26.07 8.36,26.07 9.01,26.72 v2(9.01,27.39) 9.01,29.1 9.45,29.54 C211.2@9.89,29.54 C208.2@9.89,30.49 ; v2(13.92,20.98) 13.95,20.95 R246.1@13.95,19.84 R249.1@13.95,18.86 ; D57.2@43.15,-2.2 43.15,-2.84 43.01,-2.98 43.01,-4.19 43.755,-4.935 44.415,-4.935 ; v4@44.58,-3.74 44.64,-3.74 45.205,-4.305 ; v4(45.35,-6.74) 45.35,-5.87 44.415,-4.935 ; D56.2@45.43,-2.2 45.43,-4.08 44.575,-4.935 44.415,-4.935 ; v4(47.96,-3.61) 47.96,-3.11 48.24,-2.83 D54.2@48.24,-2.2 ; v4(50.7,-4.2) 50.76,-4.14 D53.2@50.76,-2.78 ; v4(52.96,-4.14) 53.05,-4.05 D52.2@53.05,-2.77 ; R292.1@66.67,-7.213 67.168,-7.213 67.7,-6.68 69.06,-6.68 69.14,-6.6 70.461,-6.6 70.501,-6.64 70.81,-6.64 71.6,-7.43 v4(71.6,-7.48)
PNET2: C2.1 C3.1 C68.1 C203.2 C204.2 C205.1 C235.1 C237.1 D34.2 J13.21 J13.80 Q11.3 R28.2 R107.2 R108.1 R183.1 R195.1 R243.1 R244.1 R245.1 R256.2 R354.2 U1.5 U2.8 U10.1 U12.6 U18.1 U18.4 U18.10 U18.13 U18.14 U21.99 | length 494.6
  F.Cu w0.08: U2.8@-53.59,51.69 U2.8@-53.52,51.62 ; v3(-28.94,-2.55) -28.54,-2.55 -27.14,-1.15 -27.14,-0.57 -26.76,-0.19 v3(-26.5,-0.19) -25.825,-0.19 U18.1@-25.775,-0.24 ; v3(-22.26,6) -21.77,6 -21.65,5.88 v3(-20.03,5.88) ; v2(-20.94,-0.85) v2@-20.9,-0.89 ; v3(-12.69,3.77) -11.27,3.77 -10.3,2.8 -8.29,2.8 -7.88,2.39 -3.25,2.39 -3.1,2.54 2.29,2.54 2.75,2.08 5.35,2.08 U21.99@5.37,2.06 ; v4(41.91,-4.78) 41.91,-5.64 42.38,-6.11 42.38,-9.33 42.54,-9.49 45.76,-9.49 46.9,-8.35 48.82,-8.35 49.47,-9 51.84,-9 52.32,-9.48 52.32,-10.89 51.96,-11.25 51.96,-12.93 51.55,-13.34 51.55,-13.77 R183.1@50.97,-14.35
  F.Cu w0.3: U18.4@-25.775,-2.19 -24.59,-2.19 v2(-24.29,-2.49) ; U18.1@-25.775,-0.24 -24.77,-0.24 v2(-24.33,0.2) ; C68.1@-22.41,1.45 -21.6,1.45 -20.45,0.3 -20.11,0.3 ; v2(-20.99,-2.84) U18.10@-20.05,-2.84 ; v2(-20.94,-0.85) -20.94,-0.34 -20.84,-0.24 U18.14@-20.05,-0.24 -20.05,0.24 -20.11,0.3 ; v2@-20.9,-0.89 U18.13@-20.05,-0.89 ; v2(-19.84,0.3) -20.11,0.3 ; v2(22.62,12.1) 22.93,12.41 U12.6@24.34,12.41
  F.Cu w0.4: U2.8@-53.59,51.69 -52.49,51.69 -52.15,52.03 -52.15,52.56 -51.39,53.32 -51.39,54.04 v2(-50.82,54.61) ; U2.8@-53.52,51.62 C2.1@-53.52,50.63 -53.52,50.31 -53.69,50.14 -53.69,48.14 -53.3,47.75 C3.1@-52.83,47.75 -51.47,47.75 U1.5@-51.46,47.76 ; v7(-47.04,-36.91) -47.845,-37.715 D34.2@-47.845,-38.29 -47.13,-38.29 -46.71,-38.71 R195.1@-46.3,-38.71
  F.Cu w0.5: R108.1@-25.84,6.77 -25.83,6.76 -25.83,5.92 v2(-26.03,5.72) -27.14,4.61 R107.2@-27.14,4.26 -25.98,4.26 -25.8,4.44 Q11.3@-24.75,4.44 ; R28.2@12.702,45.56 12.86,45.56 v2(14.14,44.28) ; U10.1@13.45,25.47 13.45,23.79 v2(13.54,23.7)
  In1.Cu w0.08: v2(-30.78,-7.41) -29.84,-7.41 -28.94,-6.51 v3(-28.94,-2.55) ; v3(-26.5,-0.19) -25.22,1.09 -25.22,5.87 -24.61,6.48 -24.38,6.48 -24.06,6.8 -23.06,6.8 v3(-22.26,6) ; v3(-20.03,5.88) -18.79,7.12 -15.35,7.12 -14.4,6.17 -14.17,6.17 -13.79,5.79 -13.02,5.79 -12.7,5.47 -12.7,3.78 v3(-12.69,3.77)
  In3.Cu w0.08: v7(-47.04,-36.91) -47.03,-36.91
  In3.Cu w0.5: -47.03,-36.91 -32.02,-36.91 -31.05,-35.94 -29.82,-35.94 -29.5,-35.62 -27.75,-35.62 v2(-26.9,-34.77)
  In3.Cu w0.7: v2(11.8,8.2) 14.28,8.2 14.94,8.86 14.94,11.01 16.13,12.2 22.52,12.2 v2(22.62,12.1) 22.55,12.03 v2(22.55,11.3)
  In3.Cu w1: v2(-50.82,54.61) -49.54,53.33 -48.5,53.33 -47.88,52.71 -42.67,52.71 -41.36,51.4 -38.94,51.4 -38.23,52.11 -16.74,52.11 -16.07,51.44 -14.59,51.44 -13.89,50.74 -13.89,50 -9.7,45.81 -6.46,45.81 -5.94,46.33 3.43,46.33 4.94,44.82 4.94,43.35 5.62,42.67 9.57,42.67 10.36,41.88 13.04,41.88 13.73,42.57 13.73,43.87 v2(14.14,44.28)
  In4.Cu w0.5: v2(11.91,38.78) 11.91,40.69 14.14,42.92 v2(14.14,44.28)
  In5.Cu w0.7: -19.12,-1.29 -18.36,-0.53 -16.04,-0.53 -15.53,-1.04 -8.5,-1.04 -6.78,-2.76 6.61,-2.76 7.11,-3.26 9.07,-3.26 11,-1.33 13.7,-1.33 16.07,-3.7 17.2,-3.7 18.41,-4.91 v2(21.77,-4.91)
  In5.Cu w0.8: v2(21.77,-4.91) 21.9,-4.78 v4(41.91,-4.78) 41.96,-4.78 44.84,-7.66 49.78,-7.66 51.01,-6.43 55.8,-6.43 57.92,-8.55 v4(57.98,-8.55) 58.5,-9.07 64.19,-9.07 65.85,-7.41 68.1,-7.41 v4(68.11,-7.4) 68.11,-6.72 70.83,-4 v4(70.83,-1.74)
  In5.Cu w1: v2(-24.29,-2.49) -22.93,-2.49 -22.58,-2.84 v2(-20.99,-2.84) -20.48,-2.84 -19.17,-1.53
  In6.Cu w0.5: v2(-26.9,-34.77) -26.9,-33.8 -24.91,-31.81 -24.91,-29.23 -25.41,-28.73 -25.41,-18.84 -26.74,-17.51 -26.74,-10.09 -27.86,-8.97 -27.86,-6.55 -25.58,-4.27 -25.58,-0.93 -24.45,0.2 v2(-24.33,0.2) -24.33,1 -26.08,2.75 -26.08,5.67 v2(-26.03,5.72) ; v2(11.8,8.2) 12.1,8.5 12.1,15.53 11.61,16.02 11.61,17.15 12.67,18.21 12.67,22.29 13.54,23.16 v2(13.54,23.7) 13.54,24.33 12.53,25.34 12.53,32.88 ; v2(11.91,38.78) 12.53,38.16 12.53,32.88 ; v2(11.97,33.01) 12.1,32.88 12.53,32.88
  In6.Cu w0.7: v2(21.77,-4.91) 22.2,-4.48 22.2,0.67 21.56,1.31 21.56,-0.23 21.56,4.2 21.96,4.6 21.96,5.27 22.6,5.91 22.6,9.29 22.18,9.71 22.18,10.12 22.55,10.49 v2(22.55,11.3)
  In8.Cu w0.08: v2(-30.78,-7.41) -29.91,-7.41 -29.25,-6.75 -29.25,-2.66 -28.94,-2.35 v1(-28.94,1.09) ; v1(-27.58,11.89) -27.58,11.23 -27.47,11.12 -27.47,8.41 -27.08,8.02 -27.08,6.97 -27.78,6.27 -27.78,4.975 -27.31,4.505 v1(-27.31,1.09) ; v1(-25.53,11.98) -25.19,11.98 -24.86,12.31 -24.86,16.16 -24.305,16.715 -23.865,16.715 -23.5,16.35 -23.5,13.94 v1(-22.16,12.6)
  B.Cu w0.08: v1(-28.94,1.09) v1(-27.31,1.09) ; v1(-27.58,11.89) -27.55,11.89 -26.9,11.24 -26.27,11.24 v1(-25.53,11.98)
  B.Cu w0.3: v2(22.62,12.1) 23.47,12.1 23.5,12.13 C203.2@23.5,12.57
  B.Cu w0.4: C235.1@70.03,-1.71 70.06,-1.74 v4(70.83,-1.74) ; J13.21@70.94,9.25 70.94,6.2 70.84,6.1 70.84,4.99 70.89,4.94 J13.80@70.89,2.45 70.91,2.43 70.91,-1.66 v4(70.83,-1.74) ; C237.1@71.89,-1.71 71.86,-1.74 v4(70.83,-1.74)
  B.Cu w0.5: R256.2@10.31,35.778 10.31,35.36 11.97,33.7 v2(11.97,33.01) 11.97,31.69 12.39,31.27 13.06,31.27 13.79,30.54 R243.1@13.79,30.03 R245.1@13.79,29.05 ; v2(13.54,23.7) 13.67,23.7 13.92,23.45 C205.1@13.92,22.9 13.92,21.94 R244.1@13.95,21.91 ; C203.2@23.5,12.57 23.5,11.79 23.715,11.575 C204.2@25.43,11.575
PNET3: C136.1 D35.2 Q8.2 R196.2 R197.2 R198.2 R200.2 R201.2 R203.2 R204.2 R205.2 R206.2 U75.1 U75.28 | length 70.5
  F.Cu w0.4: v2(-11.67,-42.65) C136.1@-11.67,-41.82 -10.77,-41.82 -9.92,-40.97 R196.2@-9.24,-40.97 R203.2@-8,-40.97 ; v2(-8.75,-39.09) -8,-39.84 R203.2@-8,-40.97 ; R204.2@0.96,-40.97 R197.2@-0.26,-40.97 R205.2@-2.87,-40.97 R201.2@-4.2,-40.97 R198.2@-5.35,-40.97 R206.2@-6.74,-40.97 R203.2@-8,-40.97 ; v2(4.5,-37.97) 4.54,-37.93 R200.2@5.47,-37.93 5.815,-37.585 D35.2@7.38,-37.585
  F.Cu w0.5: Q8.2@-25.8,-7.795 -25.785,-7.81 v2(-24.99,-7.81)
  In4.Cu w0.5: -29.41,-20.32 -29.11,-20.02 ; v2(-24.99,-7.81) -25.82,-8.64 -25.82,-19.54 -26.3,-20.02 -29.11,-20.02 ; v2(-10.35,-33.96) -10.37,-33.98 -13.27,-33.98 -14.62,-32.63 -16.61,-32.63 -16.98,-32.26 -19.36,-32.26 -22.12,-29.5 -22.12,-27.32 -22.72,-26.72 -25.73,-26.72 -26.56,-27.55 -28.42,-27.55 -29.59,-26.38 -29.59,-20.5 -29.11,-20.02
  B.Cu w0.4: v2(-11.67,-42.65) -11.62,-42.65 U75.28@-10.41,-41.44
  B.Cu w0.5: U75.1@-10.41,-32.04 -10.41,-33.9 v2(-10.35,-33.96)
PNET4: D6.2 D39.1 D55.1 J5.3 J5.4 J5.38 | length 16.8
  F.Cu w0.4: J5.4@-19.53,24.13 -19.53,26.55 -19.23,26.55 v2(-18.84,26.16) -18.73,26.05 J5.3@-18.73,24.13 ; D6.2@-12,17.775 -11.545,17.775 -11.24,17.47 v2(-11.24,16.81)
  F.Cu w0.5: v2(-19.58,26.6) v2@-19.53,26.55 ; J5.38@-18.78,19.33 -18.78,21.07 v2(-18.52,21.33) -18.81,21.62 -18.81,22.529 -18.73,22.609 J5.3@-18.73,24.13
  B.Cu w0.6: D55.1@39.47,11.53 40.65,12.71 v2(41.36,12.71) ; D39.1@39.47,14.8 40.66,13.61 v2(41.36,13.61)
  other v2: 41.35,14.3
PNET5: C19.2 C33.1 C35.2 C84.1 C90.2 C91.1 C120.1 C243.1 C244.2 C265.2 C276.1 D12.2 D24.1 D24.3 D25.1 D25.3 D48.1 F2.2 J5.10 J5.11 J5.30 J13.40 Q1.2 Q8.1 Q11.2 Q16.2 Q17.1 Q24.2 Q25.3 Q34.3 R39.2 R47.1 R48.2 R50.1 R54.1 R55.2 R56.2 R64.1 R65.1 R88.2 R122.1 R123.1 R124.1 R125.2 R135.2 R188.2 R192.2 R193.2 R226.2 R302.1 R303.1 R305.1 R306.1 R307.1 R309.1 R311.2 R315.2 R363.2 U4.20 U4.27 U7.24 U20.8 U22.96 U26.8 U34.14 U57.14 U60.5 U70.1 U70.2 U70.25 U70.30 U71.14 U72.24 | length 501.2
  F.Cu w0.08: R47.1@-18.52,36.26 -18.5,36.24 R47.1@-18.48,36.26
  F.Cu w0.3: U7.24@-16.937,16.325 -16.275,16.325 -15.96,16.64 C35.2@-15.34,16.64 -14.57,16.64 v2(-14.56,16.63) ; C19.2@-9.39,41.24 -9.35,41.2 v2(-8.67,41.2) -8.53,41.34 U4.20@-6.95,41.34 ; v2(28.76,0.27) 28.78,0.29 U22.96@30.23,0.29 31.78,0.29 C84.1@32.08,0.59 ; C90.2@41.11,-4.72 41.11,-4.3 41.455,-3.955 D25.3@41.455,-2.63
  F.Cu w0.4: D12.2@-47.88,-5.045 R88.2@-47.88,-3.49 -46.35,-3.49 v2(-46.22,-3.62) ; R39.2@-40.63,24.5 -40.63,26.34 v2(-40.5,26.47) ; v2(-26.82,-6.96) -26.48,-6.62 -26.48,-5.95 Q8.1@-26.475,-5.945 ; U34.14@-24.92,-28.085 -24.92,-28.97 -24.59,-29.3 -23.44,-29.3 v2(-23.04,-28.9) ; U20.8@-21.32,-11.68 -21.32,-11.18 -20.87,-10.73 v2(-19.39,-10.73) ; v2(30.36,2.99) 30.54,3.17 30.54,3.42 30.83,3.71 R122.1@30.83,4.08 R123.1@32.02,4.08 ; R125.2@32.32,-4.51 32.32,-3.57 v2(32.36,-3.53) R124.1@32.36,-2.63 ; D25.1@42.78,-2.63 42.82,-2.67 U26.8@42.82,-5.05 ; D24.1@45.515,-2.615 45.515,-4.335 45.94,-4.76 v4(46.64,-4.76) ; R135.2@71.9,4.1 71.9,4.28 72.47,4.85 v5(72.47,6) 72.47,7.92 72.74,8.19 C91.1@73.11,8.19 ; R188.2@88.51,-34.515 89.51,-34.515 90.48,-34.515 v4(90.48,-33.66)
  F.Cu w0.5: v2(-45.07,48.09) -43.72,48.09 Q1.2@-43.7,48.11 ; J5.30@-25.18,19.33 -25.19,19.34 v2(-25.19,21.27) -25.14,21.32 v2(-25.14,22.43) ; C33.1@-24.85,26.86 -24.85,26.26 -24.84,26.25 -24.84,25.97 ; Q11.2@-23.8,2.44 -23.8,3.19 -23.16,3.83 v2(-22.54,3.83) ; R64.1@-20.71,36.26 R54.1@-19.62,36.26 R47.1@-18.52,36.26 ; R55.2@-19.63,34.66 R48.2@-18.5,34.66 ; R47.1@-18.5,36.24 R48.2@-18.5,34.66 ; v2(-14.5,32.16) -15.17,32.83 -15.17,34.48 -14.99,34.66 ; R65.1@-13.89,35.92 R50.1@-14.92,35.92 -14.92,35.02 -14.93,35.01 -14.93,34.72 -14.99,34.66 ; U4.27@-4.7,35.09 -4.7,36.69 v2(-2.46,38.93) ; v2(16.37,-33.71) 17.47,-33.71 Q17.1@17.515,-33.665 ; C120.1@28.24,-13.51 28.27,-13.51 28.95,-12.83 v2(29.11,-12.83) ; D25.3@41.455,-2.63 D25.1@42.78,-2.63 42.795,-2.615 D24.3@44.19,-2.615 D24.1@45.515,-2.615 ; v2(-25.14,22.43) -25.13,22.44 J5.11@-25.13,24.13 -25.11,24.15 -25.11,25.91 v2(-25.17,25.97) -24.84,25.97 ; v2(-25.14,22.43) -25.08,22.49 v2(-24.41,22.49) -24.38,22.52 J5.10@-24.38,24.13 -24.38,25.85 -24.5,25.97 -24.84,25.97 ; R48.2@-18.5,34.66 R56.2@-17.32,34.66 -14.99,34.66
  F.Cu w0.6: Q16.2@48.61,-12.55 Q16.2@48.79,-12.73
  F.Cu w0.7: v4(47.91,-12.55) Q16.2@48.61,-12.55
  In3.Cu w0.5: v2(-40.5,26.47) -37.65,26.47 v2(-37.61,26.43) -34.9,26.43 -32.76,28.57 -31.25,28.57 -29.12,30.7 -29.12,31.38 -28.85,31.65 -27.9,31.65 -27.21,30.96 v2(-27.21,30.9) ; v2(-14.5,32.16) -12.54,30.2 v2(-10.23,30.2)
  In4.Cu w0.5: v2(-26.82,-6.96) -27.29,-6.96 -27.77,-7.44 -27.77,-9.38 -26.99,-10.16 -26.99,-17.56 -27.8,-18.37 -28.63,-18.37 -30.3,-20.04 -30.3,-26.94 -28.6,-28.64 -25.16,-28.64 -24.37,-29.43 -23.57,-29.43 v2(-23.04,-28.9)
  In5.Cu w0.4: v2(-46.22,-3.62) -43.29,-6.55 -41.82,-6.55 -39.55,-8.82 -28.48,-8.82 -27.82,-8.82 ; v2(-26.82,-6.96) -27.56,-6.96 -27.82,-7.22 -27.82,-8.82 ; v2(-19.39,-10.73) -20.46,-10.73 -21.15,-10.04 -25.87,-10.04 -27.09,-8.82 -27.23,-8.82 -27.82,-8.82
  In5.Cu w0.5: v2(16.37,-33.71) 16.39,-33.69 28.8,-33.69 29.5,-34.39 33.49,-34.39 34.93,-35.83 34.93,-38.37 35.83,-39.27 40.17,-39.27 42.83,-36.61 42.83,-34.9 44.72,-33.01 48.06,-33.01 v4(49.62,-31.45)
  In5.Cu w0.6: v2(-0.84,-4.89) 0.1,-3.95 6.3,-3.95 7.15,-4.8 9.14,-4.8 9.7,-5.36 14.72,-5.36 15.49,-6.13 18.6,-6.13 20,-7.53 v2(20,-7.58)
  In5.Cu w0.7: v5(41.8,-15.91) 42.49,-15.91 43.42,-16.84 43.42,-17.52 ; 43.42,-16.95 43.42,-17.52 ; v5(47.98,-20.22) 47.05,-19.29 47.03,-19.29 45.19,-19.29 v5(44.8,-18.9) 43.42,-17.52
  In6.Cu w0.08: -2.49,38.93 v2(-2.46,38.93) ; 49.07,-15.9 49.09,-15.88
  In6.Cu w0.4: v4(81.89,-27.19) 81.89,-27.21 82.6,-27.92 82.6,-28.09 85.16,-30.65 86.84,-30.65 89.25,-33.06 89.88,-33.06 v4(90.48,-33.66)
  In6.Cu w0.5: -40.59,10.83 -40.59,13.15 ; v2(-27.83,14.78) -27.25,15.36 -27.25,17.37 -25.19,19.43 v2(-25.19,21.27) ; v2(-27.21,30.9) -25.24,28.93 -25.24,26.04 v2(-25.17,25.97) -25.17,22.68 ; v2(-25.14,22.43) -25.17,22.46 -25.17,22.68 ; v2(-24.41,22.49) -24.6,22.68 -25.17,22.68 ; v2(-0.4,-0.89) -0.4,-0.52 ; v5(49.07,-17.12) 49.07,-15.9
  In6.Cu w0.6: -40.59,10.83 -40.3,10.54 ; -0.89,-4.19 -0.84,-4.24 v2(-0.84,-4.89)
  In6.Cu w0.7: -2.49,38.93 -3.53,37.89 -3.53,35.9 -3.02,35.39 -3.02,31.86 -3.39,31.49 -3.39,13.52 -2.33,12.46 -2.33,9.98 -1.32,8.97 -1.32,4.92 -2.06,4.18 -2.06,3.44 -2.05,3.43 -2.05,0.53 ; -0.89,-4.19 -0.89,-3.06 -1.66,-2.29 -2.05,-1.9 -2.05,0.53 ; -0.4,-0.52 -0.4,0.14 -0.77,0.51 -2.03,0.51 -2.05,0.53 ; v4(47.91,-12.55) 47.91,-14.79 ; v5(47.98,-20.22) 47.47,-19.71 47.47,-19.51 47.48,-19.5 47.48,-16.88 47.91,-16.45 47.91,-14.79 ; 49.09,-15.88 48.8,-15.59 48,-14.79 47.91,-14.79 ; v4(49.7,-3.6) 49.7,-2.86 49.69,-2.85 49.69,-1.89 50.49,-1.09 50.49,0.34 53.68,3.53 55.41,3.53 56.32,4.44 56.32,5.89 v4(56.3,5.91)
  In6.Cu w0.8: v2(-46.22,-3.62) -45.55,-4.29 -43.69,-6.15 -43.08,-6.15 -41.75,-6.15 -41.51,-5.91 -41.51,-1.97 -41.51,-0.98 -41.32,-0.79 -40.53,0 -40.53,1.15 -40.53,8.38 -40.31,8.6 -40.31,9.22 -40.31,10.53 -40.3,10.54 ; v2(-45.07,48.09) -45.07,44.8 -42.18,41.91 -42.18,28.15 v2(-40.5,26.47) -40.5,25.12 -42.92,22.7 -42.92,21.18 -41.48,19.74 -41.48,14.04 -41.48,16.17 -41.19,15.88 -41.19,13.75 -40.59,13.15 ; v4(49.09,-26.65) 49.82,-26.65 50.04,-26.87 50.04,-28.49 49.62,-28.91 v4(49.62,-31.45)
  In6.Cu w0.9: v2(28.76,0.27) 29.59,0.27 30.24,-0.38 30.24,-5.66 ; v2(29.11,-12.83) 29.67,-12.27 30.24,-11.7 30.24,-7.73 ; v2(28.4,-6.71) 30.13,-6.71 30.24,-6.6 ; v2(28.4,-6.71) 29.22,-6.71 30.24,-7.73 ; v2(28.4,-6.71) 29.19,-6.71 30.24,-5.66 ; 30.24,-7.73 30.24,-6.6 ; 30.24,-6.6 30.24,-5.66
  In6.Cu w1: v2(30.36,2.99) 30.36,3.9 30.62,4.16 31.92,4.16 32.32,3.76 33.38,3.76 34.49,2.65 34.49,1.32 34.28,1.11 33.01,1.11 v2(32.91,1.01)
  B.Cu w0.08: v4(49.7,-3.6) v4@49.73,-3.63 ; F2.2@86.92,-21.96 F2.2@86.92,-21.3
  B.Cu w0.3: v2(-0.4,-0.89) -0.14,-1.15 U60.5@-0.14,-2.07 ; v5(41.8,-15.91) 41.8,-15.42 42.06,-15.16 U70.30@43.22,-15.16 ; U70.25@43.22,-18.41 44.31,-18.41 v5(44.8,-18.9) ; U72.24@47.73,-26.825 48.915,-26.825 v4(49.09,-26.65) v4@49.03,-26.71 ; U70.2@50.645,-15.81 51.42,-15.81 ; U70.1@50.645,-15.16 51.1,-15.16 51.42,-15.48 51.42,-15.81 ; v5(52.1,-16.45) 52.06,-16.45 51.42,-15.81 ; v4(61.63,-18.8) 62.21,-19.38 U71.14@63.663,-19.38 63.662,-20.677 C265.2@63.66,-20.68
  B.Cu w0.4: C276.1@47.45,-13.56 49.05,-15.16 ; U70.2@50.645,-15.81 49.11,-15.81 49.1,-15.82 49.05,-15.77 49.05,-15.16 ; U70.1@50.645,-15.16 49.05,-15.16 ; J13.40@55.74,9.25 55.74,6.47 v4(56.3,5.91) ; 56.71,-7.54 56.84,-7.67 56.84,-8.92 57.14,-9.22 U57.14@57.877,-9.22
  B.Cu w0.5: Q25.3@-49.56,46.87 -48.52,46.87 -48.21,47.18 -47.21,47.18 -46.3,48.09 ; Q24.2@-46.58,49.21 -46.58,48.37 -46.3,48.09 ; v2(-45.07,48.09) -46.3,48.09 ; v2(-40.5,26.47) -40.16,26.47 -39.733,26.898 D48.1@-39.733,27.57 -38.76,27.57 -37.62,26.43 v2(-37.61,26.43) ; R226.2@2.71,49.332 3.708,49.332 v2(3.92,49.12) ; v2(28.4,-6.71) 28.77,-7.08 R309.1@28.77,-7.27 ; R309.1@28.77,-7.4 29.44,-7.4 29.57,-7.53 R311.2@30.17,-7.53 ; R305.1@41.58,-1.5 R303.1@41.58,-0.51 41.96,-0.51 v2(42.65,0.18) ; C244.2@49.73,-4.52 v4@49.73,-3.63 ; R306.1@56.1,-7.57 56.13,-7.54 56.71,-7.54 C243.1@57.37,-7.54 57.97,-7.54 v4(58.3,-7.21) ; v4(60.42,-6.75) 60.92,-6.25 Q34.3@62.02,-6.25 ; R302.1@67.06,-10.39 67.87,-10.39 v4(67.99,-10.27) ; v4(81.89,-27.19) 81.89,-26.7 82.1,-26.49 R363.2@82.94,-26.49
  B.Cu w0.6: R307.1@19.14,-7.49 19.91,-7.49 v2(20,-7.58) 20.02,-7.6 21.05,-7.6 R315.2@21.08,-7.57
  B.Cu w0.9: v4(86.18,-22.72) 86.18,-22.7 F2.2@86.73,-22.15 ; F2.2@86.9,-21.28 86.73,-21.45 F2.2@86.73,-22.15 ; F2.2@86.92,-21.96 F2.2@86.73,-22.15
  other v5: 48.72,-20.23 64.89,5.3
PNET6: C9.1 C14.1 C149.2 C151.1 R27.2 R28.1 R36.1 R37.1 R222.1 U47.8 U48.8 | length 18.3
  F.Cu w0.4: R27.2@11.39,52.71 11.54,52.71 12.03,53.2 v2(12.85,53.2) 12.74,53.31 R37.1@12.74,53.97 ; v2(13.96,46.64) 14.26,46.94 R36.1@14.26,47.62
  F.Cu w0.5: v2(8.53,40.49) 8.69,40.65 C9.1@9.775,40.65 C14.1@9.775,42.9 9.775,45.558 R28.1@9.778,45.56
  B.Cu w0.08: v2(8.53,40.49) v2@8.54,40.49
  B.Cu w0.4: v2@8.55,40.49 v2(8.53,40.49) 8.95,40.91 U48.8@9.26,40.91
  B.Cu w0.5: R222.1@3.17,52.18 3.2,52.21 C151.1@4.2,52.21 4.81,52.21 5.19,51.83 U47.8@6.21,51.83 ; C149.2@8.09,39.79 8.09,40.05 v2(8.53,40.49)
  B.Cu w0.6: U47.8@6.21,51.83 v2(6.21,55.26)
PNET7: C76.1 C81.1 C249.2 C282.1 Q13.3 R97.2 R98.1 R112.1 R115.1 R130.1 R139.1 R144.1 R300.1 R304.2 R313.1 R316.1 R319.1 R323.1 R325.1 R365.2 R373.2 R374.2 R375.2 R376.2 R377.2 R378.2 R380.2 R381.2 R384.1 R387.1 R389.1 R391.1 R394.1 R396.1 RA1.5 RA1.6 RA1.7 RA1.8 U24.5 U36.25 U36.35 U58.5 U59.30 U59.31 U61.F14 U61.M14 | length 480.7
  F.Cu w0.08: v2(-16.16,-27.36) v2@-16.11,-27.31
  F.Cu w0.3: v2(13.26,5.79) 13.28,5.79 13.81,6.32 U24.5@13.81,6.95
  F.Cu w0.4: R97.2@-33.59,-4.54 -30.99,-4.54 -30.81,-4.72 ; Q13.3@-30.9,-5.33 -30.9,-4.81 -30.81,-4.72 ; R98.1@-28.64,-4.54 -29.7,-4.54 v2(-29.88,-4.72) -30.81,-4.72 ; v2@-16.11,-27.31 U36.35@-14.42,-27.31 ; v2(2.75,10.49) 2.75,10.86 3.09,11.2 C81.1@3.55,11.2 ; R115.1@10.43,-1.33 10.43,-0.84 10.72,-0.55 10.72,-0.31 v2(10.94,-0.09) 10.69,0.16 R112.1@10.69,0.97 ; v4(82.01,0.81) 82.01,1.1 82,1.1 81.78,1.32 81.785,1.325 RA1.5@81.785,2.13 RA1.6@82.585,2.13 RA1.7@83.41,2.13 RA1.8@84.185,2.13 ; R144.1@83.44,-0.99 R139.1@84.45,-0.99 R130.1@85.42,-0.99 86.12,-0.99 v4(86.16,-1.03)
  F.Cu w0.5: v2(-15.72,-18.5) -15.23,-18.5 U36.25@-14.42,-19.31 -15.01,-18.72 v2(-15.01,-18.42) ; v2(8.47,8.51) 8.66,8.7 C76.1@8.66,9.55
  In3.Cu w0.5: v2(-6.16,4.18) -5.5,4.84 2.02,4.84 2.63,5.45 v2(2.75,5.45) 2.8,5.4 8.5,5.4 9.02,5.92 ; v2(8.47,8.51) 9.02,7.96 9.02,5.92 ; v2(29.72,5.59) 28.54,4.41 14.22,4.41 13.26,5.37 v2(13.26,5.79) 13.13,5.92 9.02,5.92 ; v2(35.92,-1.01) 36.95,-1.01 v2(37.08,-1.14) 37.25,-0.97 37.32,-0.97 ; v4(52,-14.72) 52,-13.75 v4(52.05,-13.7) ; v2(-15.72,-18.5) -15.66,-18.56 -15.66,-19.15 -15.41,-19.4 -7.02,-19.4 -5.81,-20.61 4.81,-20.61 v2(6.64,-18.78) 4.15,-18.78 3.59,-19.34 -5.82,-19.34 -7.06,-18.1 -10.31,-18.1 -10.39,-18.18 -10.72,-18.18 -11.46,-17.44 -13.88,-17.44 -14.86,-18.42 v2(-15.01,-18.42) -15.09,-18.5 v2(-15.72,-18.5)
  In3.Cu w0.7: 2.48,-7.85 2.48,-6.14 2.6,-6.02 v2(2.6,-5.54) ; 37.32,-0.97 49.27,-0.97 v4(49.72,-0.52)
  In3.Cu w0.9: 35.25,-24.36 35.28,-24.39 37.13,-24.39
  In3.Cu w1: v2(-29.88,-4.72) -28.69,-5.91 -21.61,-5.91 -21.2,-6.32 -16.35,-6.32 -14.34,-8.33 -3.28,-8.33 ; v2(-2.63,-4.4) -2.64,-4.41 -2.64,-5.7 -2.37,-5.97 -2.37,-6.93 -2.11,-7.19 ; v2(0.56,-4.94) 0.56,-7.43 ; 2.48,-7.85 2,-8.33 1.57,-8.33 ; v2(6.64,-18.78) 13.58,-18.78 13.9,-19.1 v2(17.7,-19.1) ; v2(24.12,-25.52) 25.42,-25.52 26.24,-26.34 27.052,-26.34 29.352,-24.04 30.94,-24.04 31.24,-24.34 35.23,-24.34 35.25,-24.36 ; 37.19,-24.43 40.59,-24.43 v2(40.62,-24.4) 47.2,-24.4 48.04,-23.56 50.48,-23.56 51.67,-24.75 v4(51.83,-24.75) 52.09,-25.01 54.8,-25.01 55.94,-26.15 56.767,-26.15 56.837,-26.22 59.9,-26.22 60.79,-25.33 61.37,-25.33 61.54,-25.5 77.54,-25.5 ; v4(52.05,-13.7) 52.08,-13.73 v4(62.2,-13.73) ; 78.96,-25.5 81.56,-25.5 82.08,-25.5 v4(82.97,-24.61) ; v4(82.01,0.81) 82.01,0.457 82.567,-0.1 82.65,-0.1 82.76,-0.21 85.34,-0.21 v4(86.16,-1.03) ; -3.28,-8.33 -2.11,-8.33 ; -3.28,-8.33 -3.25,-8.33 -2.11,-7.19 ; -2.11,-8.33 -1.09,-8.33 ; -2.11,-8.33 -2.11,-7.19 ; -2.11,-7.19 -2.11,-7.31 -1.09,-8.33 ; -1.09,-8.33 -0.29,-8.33 ; -0.29,-8.33 0.61,-8.33 ; -0.29,-8.33 0.56,-7.48 0.56,-7.43 ; 0.56,-7.43 1.46,-8.33 1.57,-8.33 ; 0.56,-7.43 0.56,-8.28 0.61,-8.33 ; 0.61,-8.33 1.57,-8.33
  In4.Cu w0.5: v2(6.64,-18.78) 7.66,-17.76 7.66,-15.54 v2(10.26,-12.94)
  In6.Cu w0.5: v2(7.62,-34.49) 13.15,-34.49 v2(13.17,-34.51) ; v2(10.94,-0.09) 10.94,0.31 11.49,0.86 11.49,2.05 12.3,2.86 12.3,5.31 12.78,5.79 v2(13.26,5.79) ; v2(11.76,-28.5) 12.42,-29.16 12.52,-29.16 14.79,-31.43 14.85,-31.43
  In6.Cu w0.7: 14.85,-33.95 14.85,-33.69 15.98,-32.56 ; 14.85,-32.56 15.98,-32.56 ; 14.85,-31.43 15.98,-32.56 ; v2(27.95,-36.6) 27.95,-36.18 27.67,-35.9 20.84,-35.9 17.5,-32.56 15.98,-32.56
  In6.Cu w1: v2(-29.88,-4.72) -29.66,-4.5 v2(-29.66,1.24) ; v2(2.75,10.49) 2.14,9.88 2.14,8.65 2.04,8.55 2.08,8.51 2.08,6.12 v2(2.75,5.45) 2.75,1.28 0.63,-0.84 0.63,-1.17 0.51,-1.29 0.51,-4.89 v2(0.56,-4.94) 0.56,-7.12 1.93,-8.49 3.98,-8.49 5.55,-10.06 5.55,-17.69 v2(6.64,-18.78) ; v2(13.17,-34.51) 14.29,-34.51 14.85,-33.95 14.85,-32.56 14.85,-31.43 15.91,-30.37 17.66,-30.37 19.84,-28.19 19.84,-26.55 ; v2(17.7,-19.1) 19.2,-19.1 19.84,-19.74 19.84,-24.57 ; v2(24.12,-25.52) 20.79,-25.52 ; v2(37.08,-1.14) 37.08,-1.94 38.59,-3.45 38.59,-13.75 39.1,-14.26 39.1,-18.88 39.29,-19.07 39.29,-23.59 40.1,-24.4 v2(40.62,-24.4) ; v4(51.83,-24.75) 52.73,-24.75 53.56,-23.92 53.56,-14.44 52.82,-13.7 v4(52.05,-13.7) ; v4(62.2,-13.73) 62.2,-8.86 v4(63.08,-7.98) ; v4(82.97,-24.61) 82.97,-23.66 84.54,-22.09 84.54,-20.98 84.53,-20.97 84.53,-8.92 84.11,-8.5 84.11,-5.7 86.16,-3.65 v4(86.16,-1.03) ; 19.84,-26.55 19.84,-26.47 20.79,-25.52 ; 19.84,-26.55 19.84,-24.57 ; 19.84,-24.57 20.79,-25.52
  B.Cu w0.2: U59.31@34.59,-1.46 35.47,-1.46 v2(35.92,-1.01) 35.87,-0.96 U59.30@34.59,-0.96
  B.Cu w0.3: R396.1@11.1,-29.63 11.28,-29.63 11.7,-29.21 11.7,-28.56 v2(11.76,-28.5) ; v4(84.48,-12.37) 84.48,-12.74 84.61,-12.87 R365.2@85.29,-12.87
  B.Cu w0.4: C282.1@-17.69,-26.37 -17.22,-26.37 v2(-16.8,-26.79) ; v2(0.56,-4.94) 0.56,-3.89 1.1,-3.35 R316.1@1.17,-3.35 R323.1@2.23,-3.35 ; U61.M14@2.1,4.84 2.71,5.45 v2(2.75,5.45) ; v2(10.26,-12.94) 10.39,-13.07 R325.1@10.88,-13.07 ; v2(27.95,-36.6) 27.95,-36 R384.1@28.52,-35.43 R387.1@29.68,-35.43 R389.1@30.82,-35.43 ; R304.2@54.63,-12.56 54.63,-11.57 U58.5@54.68,-11.52
  B.Cu w0.5: v2(-6.16,4.18) -6.16,4.2 U61.F14@-5.52,4.84 ; R319.1@-2.78,-3.42 -2.78,-4.25 v2(-2.63,-4.4) ; v2(7.62,-34.49) 7.78,-34.65 R394.1@8.27,-34.65 ; R391.1@12.35,-34.65 13.03,-34.65 v2(13.17,-34.51) ; R313.1@28.49,5.637 28.497,5.63 29.68,5.63 v2(29.72,5.59) ; C249.2@36.92,-2.2 36.92,-1.84 37.08,-1.68 v2(37.08,-1.14) ; v4(52,-14.72) 54.57,-14.72 R377.2@54.63,-14.66 ; R380.2@54.63,-20.89 R375.2@54.63,-19.82 R376.2@54.63,-18.79 R374.2@54.63,-17.78 R373.2@54.63,-16.77 R378.2@54.63,-15.64 R377.2@54.63,-14.66 ; R304.2@54.63,-12.56 R381.2@54.63,-13.67 R377.2@54.63,-14.66 ; v4(63.08,-7.98) 63.855,-7.205 R300.1@64.89,-7.205
PNET8: C118.1 C139.2 Q17.2 Q39.1 Q40.1 R171.1 R385.2 U44.8 | length 17.9
  F.Cu w0.3: C139.2@21.31,-38.96 21.74,-38.96 22.6,-39.82 v2(22.6,-40.22) 22.61,-40.23 U44.8@22.61,-40.82
  F.Cu w0.4: R171.1@24.16,-35.37 24.16,-36.27 24.64,-36.75 v2(24.77,-36.75)
  F.Cu w0.5: C118.1@14.82,-35.81 15.55,-36.54 v2(16.09,-36.54) 16.84,-36.54 17.67,-35.71 18.87,-35.71 ; Q17.2@18.19,-35.515 18.385,-35.71 18.87,-35.71 ; v2(20.41,-32.68) 20.41,-35.21 19.91,-35.71 18.87,-35.71
  B.Cu w0.08: v2(20.41,-32.68) v2@20.44,-32.71
  B.Cu w0.4: R385.2@20.44,-33.4 v2@20.44,-32.71 ; v2(24.77,-36.75) 25.13,-36.39 Q39.1@25.13,-35.37
  B.Cu w0.5: v2(16.09,-36.54) 16.36,-36.54 Q40.1@17.29,-35.61
PNET9: C116.1 C278.2 C279.1 J10.104 J10.105 R166.1 R169.1 R170.1 R172.2 R175.2 R178.2 R379.2 U70.20 U74.E10 U74.H13 | length 28.3
  F.Cu w0.3: R172.2@32.04,-13.42 32.3,-13.42 v2(33.01,-12.71) ; J10.105@34.45,-14 35.75,-14 35.93,-13.82 v2(35.93,-13.34) 35.92,-13.35 J10.104@34.45,-13.35
  F.Cu w0.5: R178.2@25.72,-28.69 26.15,-28.69 26.67,-29.21 v2(26.67,-29.27) ; R175.2@28.52,-27.36 29.14,-26.74 v2(29.21,-26.74) ; C116.1@29.72,-23.64 C116.1@29.79,-23.64 ; C116.1@29.74,-23.63 29.8,-23.63 v2(30.47,-22.96) 30.48,-22.96 30.97,-23.45 R169.1@31.18,-23.45 ; R170.1@31.12,-25.97 30.62,-25.47 v2(30.5,-25.47) 30.59,-25.47 R166.1@31.12,-24.94
  In4.Cu w0.5: v2(30.34,-20.41) 31.09,-21.16 31.09,-22.34 v2(30.47,-22.96)
  In6.Cu w0.5: v2(26.67,-29.27) 27.08,-28.86 27.08,-28.799 27.279,-28.6 28.5,-28.6 28.53,-28.57 28.53,-27.92 28.52,-27.91 28.52,-27.6 28.64,-27.48 28.64,-27.29 29.19,-26.74 v2(29.21,-26.74) ; v2(41.77,-21.95) 41.77,-20.85 v2(41.82,-20.8)
  In6.Cu w0.7: v2(29.21,-26.74) 30.48,-25.47 v2(30.5,-25.47) ; v2(41.11,-20.92) 41.23,-20.8 v2(41.82,-20.8)
  B.Cu w0.3: v2(41.77,-21.95) 42.06,-21.66 U70.20@43.22,-21.66
  B.Cu w0.4: U74.E10@25.925,-24.79 26.605,-25.47 v2(26.72,-25.47) ; C278.2@38.17,-20.94 C279.1@39.25,-20.94 39.28,-20.97 R379.2@40.34,-20.97 40.75,-20.97 40.8,-20.92 v2(41.11,-20.92)
  B.Cu w0.5: U74.H13@29.73,-20.96 30.28,-20.41 v2(30.34,-20.41)